# Altium PCB PCB1.PcbDoc (part 2 of 2)
Units mm, origin at the board's own origin, x right, y up, seen from the top; angles counter-clockwise.
Board outline 152.4 x 101.6 mm, 2 copper layers (Top Layer, Bottom Layer); 161 components, 26 nets, 707 pads, 0 vias.
Unrouted connection lines stored in the file: 171.
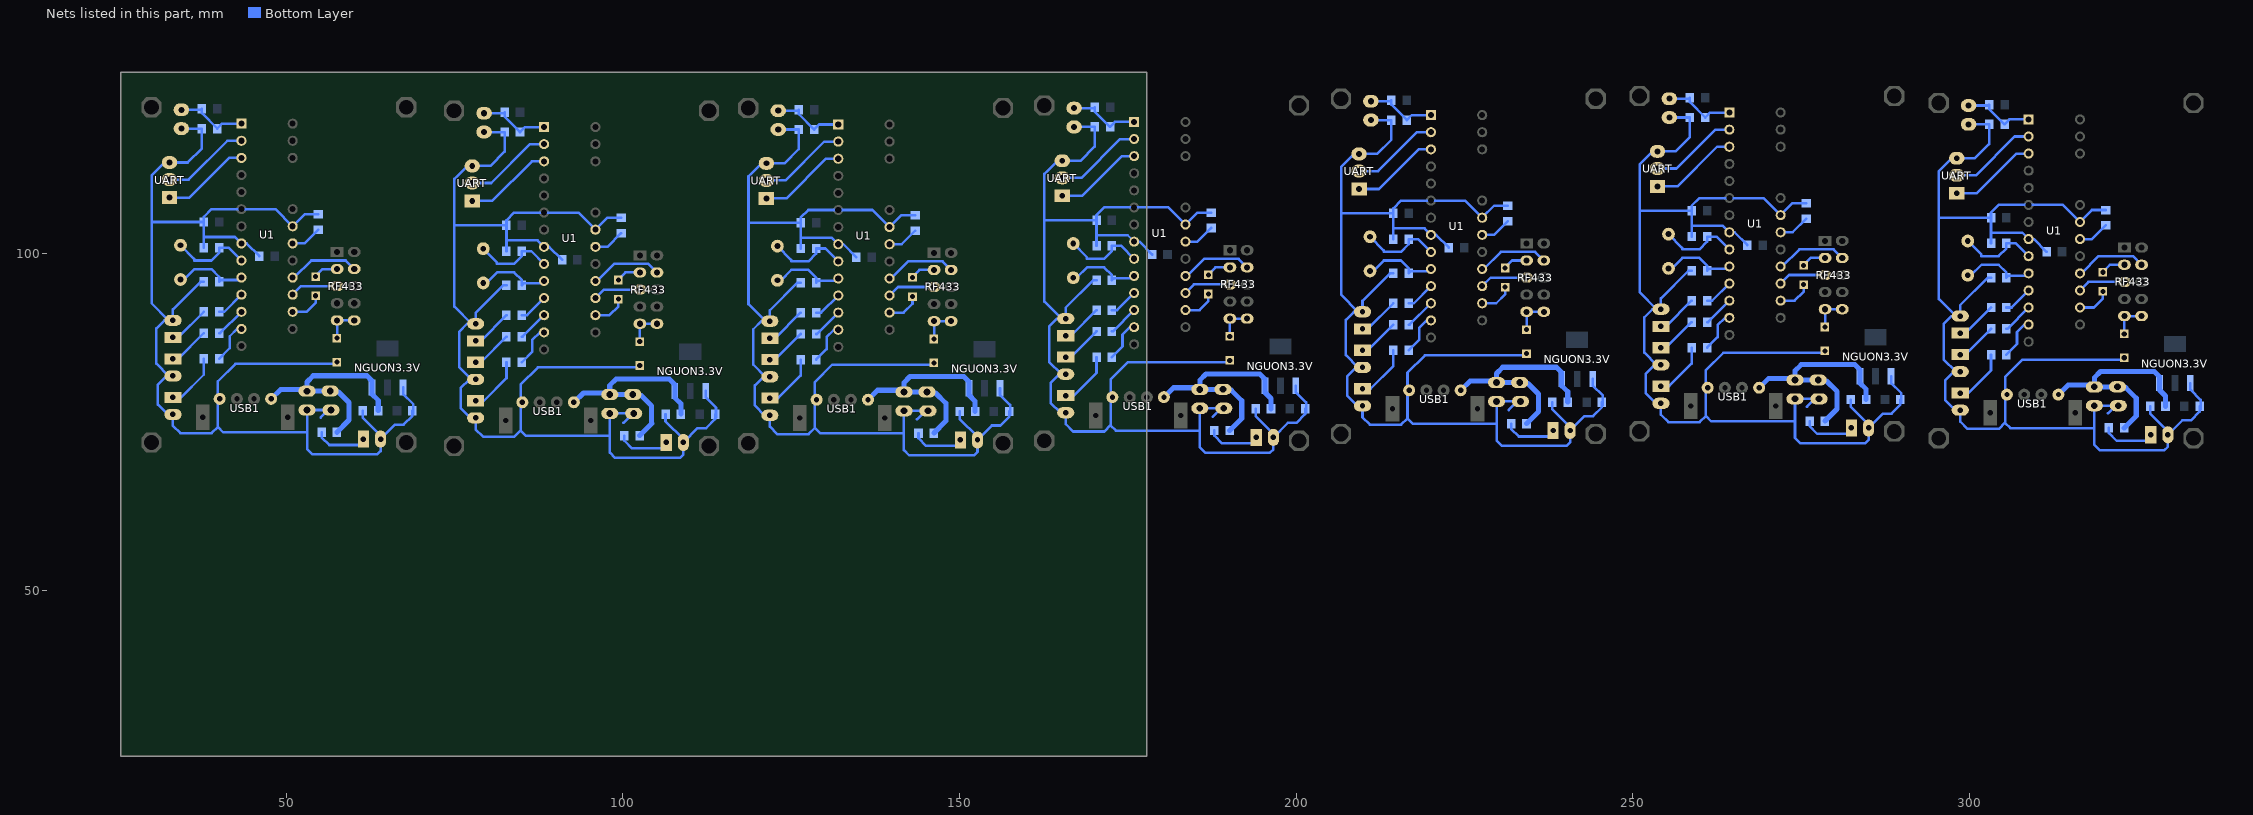
[diagram p2: the nets of this part, all layers, seen from the top]

## Nets (pads, with @x,y where several pads share a name; then routed paths per layer and width w, separated by ;. In a path a pad name is that pad's centre, name@x,y a point inside that pad or via, vN(x,y) a via of type N, cw(c..) or ccw(c..) an arc to the next point about the centre after c; other vN are vias at no path point) (continued)
GND: C1.1 C2.2 C3.1 C4.2 C5.2 C6.1 C7.1 C8.1 L1.2 L2.2 L3.2 L4.2 NGUON3.3V.1 pad.0@56.642,76.835 pad.0@57.531,83.947 pad.0@101.6,76.327 pad.0@102.489,83.439 pad.0@145.288,76.708 pad.0@146.177,83.82 pad.0@189.23,77.089 pad.0@190.119,84.201 pad.0@233.299,78.105 pad.0@234.188,85.217 pad.0@277.622,78.486 pad.0@278.511,85.598 pad.0@322.072,77.47 pad.0@322.961,84.582 pad.1@34.417,118.618 pad.1@53.086,76.835 pad.1@79.375,118.11 pad.1@98.044,76.327 pad.1@123.063,118.491 pad.1@141.732,76.708 pad.1@167.005,118.872 pad.1@185.674,77.089 pad.1@211.074,119.888 pad.1@229.743,78.105 pad.1@255.397,120.269 pad.1@274.066,78.486 pad.1@299.847,119.253 pad.1@318.516,77.47 pad.2@57.531,87.503 pad.2@102.489,86.995 pad.2@146.177,87.376 pad.2@190.119,87.757 pad.2@234.188,88.773 pad.2@278.511,89.154 pad.2@322.961,88.138 RF433.5 RF433.10 U1.8 U1.22 UART.3 USB1.4 | length 1405.1
  Bottom Layer w0.381: L3.2@33.172,81.89 L3.2@32.537,81.89 ; pad.1@34.417,118.618 C3.1@37.465,118.618 37.465,115.697 35.357,113.589 UART.3@32.664,113.589 31.928,113.589 29.997,111.658 29.997,104.623 ; C5.2@37.744,95.86 37.262,95.86 33.172,91.77 L2.2@33.172,90.145 L2.2@32.537,90.145 ; C4.2@37.744,100.94 37.744,102.527 ; C1.1@45.999,99.67 44.094,101.575 U1.8@43.332,101.575 42.38,102.527 37.744,102.527 ; 53.061,73.508 40.64,73.508 39.853,74.295 39.853,74.32 ; C8.1@54.762,105.893 52.73,105.893 U1.22@50.952,104.115 48.412,106.655 38.887,106.655 37.744,105.512 C2.2@37.744,104.75 ; 55.118,75.692 pad.0@56.261,76.835 ; pad.0@56.642,76.835 pad.0@56.261,76.835 ; pad.0@57.531,83.947 57.264,83.68 42.431,83.68 39.853,81.102 39.853,74.32 ; pad.2@57.531,87.503 57.556,87.528 RF433.5@57.556,90.145 RF433.10@60.096,90.145 ; C6.1@61.366,76.733 61.366,75.654 64.008,73.012 L4.2@64.008,72.517 ; NGUON3.3V.1@67.349,80.183 67.349,79.209 68.859,77.699 C7.1@68.859,76.276 ; C7.1@68.732,76.733 68.732,75.971 67.412,74.651 66.142,74.651 L4.2@64.008,72.517 ; L3.2@78.13,81.382 L3.2@77.495,81.382 ; pad.1@79.375,118.11 C3.1@82.423,118.11 82.423,115.189 80.315,113.081 UART.3@77.622,113.081 76.886,113.081 74.955,111.15 74.955,104.115 ; C5.2@82.702,95.352 82.22,95.352 78.13,91.262 L2.2@78.13,89.637 L2.2@77.495,89.637 ; C4.2@82.702,100.432 82.702,102.019 ; C1.1@90.957,99.162 89.052,101.067 U1.8@88.29,101.067 87.338,102.019 82.702,102.019 ; 98.019,73 85.598,73 84.811,73.787 84.811,73.812 ; C8.1@99.72,105.385 97.688,105.385 U1.22@95.91,103.607 93.37,106.147 83.845,106.147 82.702,105.004 C2.2@82.702,104.242 ; 100.076,74.93 pad.0@101.473,76.327 ; pad.0@101.6,76.327 pad.0@101.473,76.327 ; pad.0@102.489,83.439 102.222,83.172 87.389,83.172 84.811,80.594 84.811,73.812 ; pad.2@102.489,86.995 102.514,87.02 RF433.5@102.514,89.637 RF433.10@105.054,89.637 ; C6.1@106.324,76.225 106.324,75.146 108.966,72.504 L4.2@108.966,72.009 ; NGUON3.3V.1@112.307,79.675 112.307,78.701 113.817,77.191 C7.1@113.817,75.768 ; C7.1@113.69,76.225 113.69,75.463 112.37,74.143 111.1,74.143 L4.2@108.966,72.009 ; L3.2@121.818,81.763 L3.2@121.183,81.763 ; pad.1@123.063,118.491 C3.1@126.111,118.491 126.111,115.57 124.003,113.462 UART.3@121.31,113.462 120.574,113.462 118.643,111.531 118.643,104.496 ; C5.2@126.39,95.733 125.908,95.733 121.818,91.643 L2.2@121.818,90.018 L2.2@121.183,90.018 ; C4.2@126.39,100.813 126.39,102.4 ; C1.1@134.645,99.543 132.74,101.448 U1.8@131.978,101.448 131.026,102.4 126.39,102.4 ; 141.707,73.381 129.286,73.381 128.499,74.168 128.499,74.193 ; C8.1@143.408,105.766 141.376,105.766 U1.22@139.598,103.988 137.058,106.528 127.533,106.528 126.39,105.385 C2.2@126.39,104.623 ; 143.637,75.438 pad.0@144.907,76.708 ; pad.0@145.288,76.708 pad.0@144.907,76.708 ; pad.0@146.177,83.82 145.91,83.553 131.077,83.553 128.499,80.975 128.499,74.193 ; pad.2@146.177,87.376 146.202,87.401 RF433.5@146.202,90.018 RF433.10@148.742,90.018 ; C6.1@150.012,76.606 150.012,75.527 152.654,72.885 L4.2@152.654,72.39 ; NGUON3.3V.1@155.995,80.056 155.995,79.082 157.505,77.572 C7.1@157.505,76.149 ; C7.1@157.378,76.606 157.378,75.844 156.058,74.524 154.788,74.524 L4.2@152.654,72.39 ; L3.2@165.76,82.144 L3.2@165.125,82.144 ; pad.1@167.005,118.872 C3.1@170.053,118.872 170.053,115.951 167.945,113.843 UART.3@165.252,113.843 164.516,113.843 162.585,111.912 162.585,104.877 ; C5.2@170.332,96.114 169.85,96.114 165.76,92.024 L2.2@165.76,90.399 L2.2@165.125,90.399 ; C4.2@170.332,101.194 170.332,102.781 ; C1.1@178.587,99.924 176.682,101.829 U1.8@175.92,101.829 174.968,102.781 170.332,102.781 ; 185.649,73.762 173.228,73.762 172.441,74.549 172.441,74.574 ; C8.1@187.35,106.147 185.318,106.147 U1.22@183.54,104.369 181,106.909 171.475,106.909 170.332,105.766 C2.2@170.332,105.004 ; 187.579,75.819 pad.0@188.849,77.089 ; pad.0@189.23,77.089 pad.0@188.849,77.089 ; pad.0@190.119,84.201 189.852,83.934 175.019,83.934 172.441,81.356 172.441,74.574 ; pad.2@190.119,87.757 190.144,87.782 RF433.5@190.144,90.399 RF433.10@192.684,90.399 ; C6.1@193.954,76.987 193.954,75.908 196.596,73.266 L4.2@196.596,72.771 ; NGUON3.3V.1@199.937,80.437 199.937,79.463 201.447,77.953 C7.1@201.447,76.53 ; C7.1@201.32,76.987 201.32,76.225 200,74.905 198.73,74.905 L4.2@196.596,72.771 ; L3.2@209.829,83.16 L3.2@209.194,83.16 ; pad.1@211.074,119.888 C3.1@214.122,119.888 214.122,116.967 212.014,114.859 UART.3@209.321,114.859 208.585,114.859 206.654,112.928 206.654,105.893 ; C5.2@214.401,97.13 213.919,97.13 209.829,93.04 L2.2@209.829,91.415 L2.2@209.194,91.415 ; C4.2@214.401,102.21 214.401,103.797 ; C1.1@222.656,100.94 220.751,102.845 U1.8@219.989,102.845 219.037,103.797 214.401,103.797 ; 229.718,74.778 217.297,74.778 216.51,75.565 216.51,75.59 ; C8.1@231.419,107.163 229.387,107.163 U1.22@227.609,105.385 225.069,107.925 215.544,107.925 214.401,106.782 C2.2@214.401,106.02 ; 231.521,76.835 pad.0@232.791,78.105 ; pad.0@233.299,78.105 pad.0@232.791,78.105 ; pad.0@234.188,85.217 233.921,84.95 219.088,84.95 216.51,82.372 216.51,75.59 ; pad.2@234.188,88.773 234.213,88.798 RF433.5@234.213,91.415 RF433.10@236.753,91.415 ; C6.1@238.023,78.003 238.023,76.924 240.665,74.282 L4.2@240.665,73.787 ; NGUON3.3V.1@244.006,81.453 244.006,80.479 245.516,78.969 C7.1@245.516,77.546 ; C7.1@245.389,78.003 245.389,77.241 244.069,75.921 242.799,75.921 L4.2@240.665,73.787 ; L3.2@254.152,83.541 L3.2@253.517,83.541 ; pad.1@255.397,120.269 C3.1@258.445,120.269 258.445,117.348 256.337,115.24 UART.3@253.644,115.24 252.908,115.24 250.977,113.309 250.977,106.274 ; C5.2@258.724,97.511 258.242,97.511 254.152,93.421 L2.2@254.152,91.796 L2.2@253.517,91.796 ; C4.2@258.724,102.591 258.724,104.178 ; C1.1@266.979,101.321 265.074,103.226 U1.8@264.312,103.226 263.36,104.178 258.724,104.178 ; 274.041,75.159 261.62,75.159 260.833,75.946 260.833,75.971 ; C8.1@275.742,107.544 273.71,107.544 U1.22@271.932,105.766 269.392,108.306 259.867,108.306 258.724,107.163 C2.2@258.724,106.401 ; 275.844,77.343 pad.0@276.987,78.486 ; pad.0@277.622,78.486 pad.0@276.987,78.486 ; pad.0@278.511,85.598 278.244,85.331 263.411,85.331 260.833,82.753 260.833,75.971 ; pad.2@278.511,89.154 278.536,89.179 RF433.5@278.536,91.796 RF433.10@281.076,91.796 ; C6.1@282.346,78.384 282.346,77.305 284.988,74.663 L4.2@284.988,74.168 ; NGUON3.3V.1@288.329,81.834 288.329,80.86 289.839,79.35 C7.1@289.839,77.927 ; C7.1@289.712,78.384 289.712,77.622 288.392,76.302 287.122,76.302 L4.2@284.988,74.168 ; L3.2@298.602,82.525 L3.2@297.967,82.525 ; pad.1@299.847,119.253 C3.1@302.895,119.253 302.895,116.332 300.787,114.224 UART.3@298.094,114.224 297.358,114.224 295.427,112.293 295.427,105.258 ; C5.2@303.174,96.495 302.692,96.495 298.602,92.405 L2.2@298.602,90.78 L2.2@297.967,90.78 ; C4.2@303.174,101.575 303.174,103.162 ; C1.1@311.429,100.305 309.524,102.21 U1.8@308.762,102.21 307.81,103.162 303.174,103.162 ; 318.491,74.143 306.07,74.143 305.283,74.93 305.283,74.955 ; C8.1@320.192,106.528 318.16,106.528 U1.22@316.382,104.75 313.842,107.29 304.317,107.29 303.174,106.147 C2.2@303.174,105.385 ; 320.548,76.327 pad.0@321.691,77.47 ; pad.0@322.072,77.47 pad.0@321.691,77.47 ; pad.0@322.961,84.582 322.694,84.315 307.861,84.315 305.283,81.737 305.283,74.955 ; pad.2@322.961,88.138 322.986,88.163 RF433.5@322.986,90.78 RF433.10@325.526,90.78 ; C6.1@326.796,77.368 326.796,76.289 329.438,73.647 L4.2@329.438,73.152 ; NGUON3.3V.1@332.779,80.818 332.779,79.844 334.289,78.334 C7.1@334.289,76.911 ; C7.1@334.162,77.368 334.162,76.606 332.842,75.286 331.572,75.286 L4.2@329.438,73.152 ; 29.997,104.623 29.997,92.685 L2.2@32.537,90.145 ; 29.997,104.623 30.124,104.75 C2.2@37.744,104.75 ; L3.2@32.537,81.89 30.709,83.718 30.709,88.951 31.902,90.145 L2.2@32.537,90.145 ; L3.2@32.537,81.89 32.233,81.89 30.937,80.594 30.937,77.648 32.41,76.175 L1.2@33.172,76.175 33.172,74.473 34.265,73.381 38.913,73.381 39.853,74.32 ; 37.744,102.527 C2.2@37.744,104.75 ; pad.0@56.261,76.835 pad.1@53.086,76.835 53.086,71.018 53.873,70.231 63.5,70.231 64.008,70.739 L4.2@64.008,72.517 ; 74.955,104.115 75.082,104.242 C2.2@82.702,104.242 ; 74.955,104.115 74.955,92.177 L2.2@77.495,89.637 ; L3.2@77.495,81.382 77.191,81.382 75.895,80.086 75.895,77.14 77.368,75.667 L1.2@78.13,75.667 78.13,73.965 79.223,72.873 83.871,72.873 84.811,73.812 ; L3.2@77.495,81.382 75.667,83.21 75.667,88.443 76.86,89.637 L2.2@77.495,89.637 ; 82.702,102.019 C2.2@82.702,104.242 ; pad.0@101.473,76.327 pad.1@98.044,76.327 98.044,70.51 98.831,69.723 108.458,69.723 108.966,70.231 L4.2@108.966,72.009 ; 118.643,104.496 118.77,104.623 C2.2@126.39,104.623 ; 118.643,104.496 118.643,92.558 L2.2@121.183,90.018 ; L3.2@121.183,81.763 120.879,81.763 119.583,80.467 119.583,77.521 121.056,76.048 L1.2@121.818,76.048 121.818,74.346 122.911,73.254 127.559,73.254 128.499,74.193 ; L3.2@121.183,81.763 119.355,83.591 119.355,88.824 120.548,90.018 L2.2@121.183,90.018 ; 126.39,102.4 C2.2@126.39,104.623 ; pad.0@144.907,76.708 pad.1@141.732,76.708 141.732,70.891 142.519,70.104 152.146,70.104 152.654,70.612 L4.2@152.654,72.39 ; 162.585,104.877 162.712,105.004 C2.2@170.332,105.004 ; 162.585,104.877 162.585,92.939 L2.2@165.125,90.399 ; L3.2@165.125,82.144 164.821,82.144 163.525,80.848 163.525,77.902 164.998,76.429 L1.2@165.76,76.429 165.76,74.727 166.853,73.635 171.501,73.635 172.441,74.574 ; L3.2@165.125,82.144 163.297,83.972 163.297,89.205 164.49,90.399 L2.2@165.125,90.399 ; 170.332,102.781 C2.2@170.332,105.004 ; pad.0@188.849,77.089 pad.1@185.674,77.089 185.674,71.272 186.461,70.485 196.088,70.485 196.596,70.993 L4.2@196.596,72.771 ; 206.654,105.893 206.781,106.02 C2.2@214.401,106.02 ; 206.654,105.893 206.654,93.955 L2.2@209.194,91.415 ; L3.2@209.194,83.16 208.89,83.16 207.594,81.864 207.594,78.918 209.067,77.445 L1.2@209.829,77.445 209.829,75.743 210.922,74.651 215.57,74.651 216.51,75.59 ; L3.2@209.194,83.16 207.366,84.988 207.366,90.221 208.559,91.415 L2.2@209.194,91.415 ; 214.401,103.797 C2.2@214.401,106.02 ; pad.0@232.791,78.105 pad.1@229.743,78.105 229.743,72.288 230.53,71.501 240.157,71.501 240.665,72.009 L4.2@240.665,73.787 ; 250.977,106.274 251.104,106.401 C2.2@258.724,106.401 ; 250.977,106.274 250.977,94.336 L2.2@253.517,91.796 ; L3.2@253.517,83.541 253.213,83.541 251.917,82.245 251.917,79.299 253.39,77.826 L1.2@254.152,77.826 254.152,76.124 255.245,75.032 259.893,75.032 260.833,75.971 ; L3.2@253.517,83.541 251.689,85.369 251.689,90.602 252.882,91.796 L2.2@253.517,91.796 ; 258.724,104.178 C2.2@258.724,106.401 ; pad.0@276.987,78.486 pad.1@274.066,78.486 274.066,72.669 274.853,71.882 284.48,71.882 284.988,72.39 L4.2@284.988,74.168 ; 295.427,105.258 295.554,105.385 C2.2@303.174,105.385 ; 295.427,105.258 295.427,93.32 L2.2@297.967,90.78 ; L3.2@297.967,82.525 297.663,82.525 296.367,81.229 296.367,78.283 297.84,76.81 L1.2@298.602,76.81 298.602,75.108 299.695,74.016 304.343,74.016 305.283,74.955 ; L3.2@297.967,82.525 296.139,84.353 296.139,89.586 297.332,90.78 L2.2@297.967,90.78 ; 303.174,103.162 C2.2@303.174,105.385 ; pad.0@321.691,77.47 pad.1@318.516,77.47 318.516,71.653 319.303,70.866 328.93,70.866 329.438,71.374 L4.2@329.438,73.152
LED1: R4.1 U1.13 | length 43.3
  Bottom Layer w0.381: R4.1@40.03,84.43 41.605,86.004 41.605,87.782 42.697,88.875 U1.13@43.332,88.875 ; R4.1@84.988,83.922 86.563,85.496 86.563,87.274 87.655,88.367 U1.13@88.29,88.367 ; R4.1@128.676,84.303 130.251,85.877 130.251,87.655 131.343,88.748 U1.13@131.978,88.748 ; R4.1@172.618,84.684 174.193,86.258 174.193,88.036 175.285,89.129 U1.13@175.92,89.129 ; R4.1@216.687,85.7 218.262,87.274 218.262,89.052 219.354,90.145 U1.13@219.989,90.145 ; R4.1@261.01,86.081 262.585,87.655 262.585,89.433 263.677,90.526 U1.13@264.312,90.526 ; R4.1@305.46,85.065 307.035,86.639 307.035,88.417 308.127,89.51 U1.13@308.762,89.51
LED2: R5.1 U1.11 | length 30.5
  Bottom Layer w0.381: R5.1@40.03,91.415 40.792,91.415 U1.11@43.332,93.955 ; R5.1@84.988,90.907 85.75,90.907 U1.11@88.29,93.447 ; R5.1@128.676,91.288 129.438,91.288 U1.11@131.978,93.828 ; R5.1@172.618,91.669 173.38,91.669 U1.11@175.92,94.209 ; R5.1@216.687,92.685 217.449,92.685 U1.11@219.989,95.225 ; R5.1@261.01,93.066 261.772,93.066 U1.11@264.312,95.606 ; R5.1@305.46,92.05 306.222,92.05 U1.11@308.762,94.59
LED3: R6.1 U1.12 | length 32.3
  Bottom Layer w0.381: R6.1@40.03,88.24 40.157,88.24 U1.12@43.332,91.415 ; R6.1@84.988,87.732 85.115,87.732 U1.12@88.29,90.907 ; R6.1@128.676,88.113 128.803,88.113 U1.12@131.978,91.288 ; R6.1@172.618,88.494 172.745,88.494 U1.12@175.92,91.669 ; R6.1@216.687,89.51 216.814,89.51 U1.12@219.989,92.685 ; R6.1@261.01,89.891 261.137,89.891 U1.12@264.312,93.066 ; R6.1@305.46,88.875 305.587,88.875 U1.12@308.762,92.05
MISO: RF433.3 U1.18 | length 49.9
  Bottom Layer w0.381: U1.18@50.952,93.955 52.222,95.225 RF433.3@57.556,95.225 ; U1.18@95.91,93.447 97.18,94.717 RF433.3@102.514,94.717 ; U1.18@139.598,93.828 140.868,95.098 RF433.3@146.202,95.098 ; U1.18@183.54,94.209 184.81,95.479 RF433.3@190.144,95.479 ; U1.18@227.609,95.225 228.879,96.495 RF433.3@234.213,96.495 ; U1.18@271.932,95.606 273.202,96.876 RF433.3@278.536,96.876 ; U1.18@316.382,94.59 317.652,95.86 RF433.3@322.986,95.86
MOSI: pad.3@54.356,96.647 pad.3@99.314,96.139 pad.3@143.002,96.52 pad.3@186.944,96.901 pad.3@231.013,97.917 pad.3@275.336,98.298 pad.3@319.786,97.282 pad.4 RF433.2 U1.17 | length 61.1
  Bottom Layer w0.381: U1.17@50.952,91.415 53.035,91.415 54.356,92.735 pad.4@54.356,93.802 ; pad.3@54.356,96.647 54.356,96.723 55.397,97.765 RF433.2@57.556,97.765 ; U1.17@95.91,90.907 97.993,90.907 99.314,92.227 pad.4@99.314,93.294 ; pad.3@99.314,96.139 99.314,96.215 100.355,97.257 RF433.2@102.514,97.257 ; U1.17@139.598,91.288 141.681,91.288 143.002,92.608 pad.4@143.002,93.675 ; pad.3@143.002,96.52 143.002,96.596 144.043,97.638 RF433.2@146.202,97.638 ; U1.17@183.54,91.669 185.623,91.669 186.944,92.989 pad.4@186.944,94.056 ; pad.3@186.944,96.901 186.944,96.977 187.985,98.019 RF433.2@190.144,98.019 ; U1.17@227.609,92.685 229.692,92.685 231.013,94.005 pad.4@231.013,95.072 ; pad.3@231.013,97.917 231.013,97.993 232.054,99.035 RF433.2@234.213,99.035 ; U1.17@271.932,93.066 274.015,93.066 275.336,94.386 pad.4@275.336,95.453 ; pad.3@275.336,98.298 275.336,98.374 276.377,99.416 RF433.2@278.536,99.416 ; U1.17@316.382,92.05 318.465,92.05 319.786,93.37 pad.4@319.786,94.437 ; pad.3@319.786,97.282 319.786,97.358 320.827,98.4 RF433.2@322.986,98.4
NC: 
NetC8_2: C8.2 U1.21 | length 32.6
  Bottom Layer w0.381: U1.21@50.952,101.575 52.73,101.575 C8.2@54.762,103.607 ; U1.21@95.91,101.067 97.688,101.067 C8.2@99.72,103.099 ; U1.21@139.598,101.448 141.376,101.448 C8.2@143.408,103.48 ; U1.21@183.54,101.829 185.318,101.829 C8.2@187.35,103.861 ; U1.21@227.609,102.845 229.387,102.845 C8.2@231.419,104.877 ; U1.21@271.932,103.226 273.71,103.226 C8.2@275.742,105.258 ; U1.21@316.382,102.21 318.16,102.21 C8.2@320.192,104.242
NetL1_1: L1.1 R4.2 | length 58.3
  Bottom Layer w0.381: L1.1@33.172,78.715 34.392,78.715 37.744,82.067 R4.2@37.744,84.43 ; L1.1@78.13,78.207 79.35,78.207 82.702,81.559 R4.2@82.702,83.922 ; L1.1@121.818,78.588 123.038,78.588 126.39,81.94 R4.2@126.39,84.303 ; L1.1@165.76,78.969 166.98,78.969 170.332,82.321 R4.2@170.332,84.684 ; L1.1@209.829,79.985 211.049,79.985 214.401,83.337 R4.2@214.401,85.7 ; L1.1@254.152,80.366 255.372,80.366 258.724,83.718 R4.2@258.724,86.081 ; L1.1@298.602,79.35 299.822,79.35 303.174,82.702 R4.2@303.174,85.065
NetL2_1: L2.1 R5.2 | length 43.1
  Bottom Layer w0.381: L2.1@33.172,87.605 33.934,87.605 R5.2@37.744,91.415 ; L2.1@78.13,87.097 78.892,87.097 R5.2@82.702,90.907 ; L2.1@121.818,87.478 122.58,87.478 R5.2@126.39,91.288 ; L2.1@165.76,87.859 166.522,87.859 R5.2@170.332,91.669 ; L2.1@209.829,88.875 210.591,88.875 R5.2@214.401,92.685 ; L2.1@254.152,89.256 254.914,89.256 R5.2@258.724,93.066 ; L2.1@298.602,88.24 299.364,88.24 R5.2@303.174,92.05
NetL3_1: L3.1 R6.2 | length 43.1
  Bottom Layer w0.381: L3.1@33.172,84.43 33.934,84.43 R6.2@37.744,88.24 ; L3.1@78.13,83.922 78.892,83.922 R6.2@82.702,87.732 ; L3.1@121.818,84.303 122.58,84.303 R6.2@126.39,88.113 ; L3.1@165.76,84.684 166.522,84.684 R6.2@170.332,88.494 ; L3.1@209.829,85.7 210.591,85.7 R6.2@214.401,89.51 ; L3.1@254.152,86.081 254.914,86.081 R6.2@258.724,89.891 ; L3.1@298.602,85.065 299.364,85.065 R6.2@303.174,88.875
NetL4_1: L4.1 R7.2 | length 56.9
  Bottom Layer w0.381: R7.2@55.245,73.533 55.245,72.771 56.388,71.628 61.087,71.628 61.468,72.009 L4.1@61.468,72.517 ; R7.2@100.203,73.025 100.203,72.263 101.346,71.12 106.045,71.12 106.426,71.501 L4.1@106.426,72.009 ; R7.2@143.891,73.406 143.891,72.644 145.034,71.501 149.733,71.501 150.114,71.882 L4.1@150.114,72.39 ; R7.2@187.833,73.787 187.833,73.025 188.976,71.882 193.675,71.882 194.056,72.263 L4.1@194.056,72.771 ; R7.2@231.902,74.803 231.902,74.041 233.045,72.898 237.744,72.898 238.125,73.279 L4.1@238.125,73.787 ; R7.2@276.225,75.184 276.225,74.422 277.368,73.279 282.067,73.279 282.448,73.66 L4.1@282.448,74.168 ; R7.2@320.675,74.168 320.675,73.406 321.818,72.263 326.517,72.263 326.898,72.644 L4.1@326.898,73.152
OSC1: C4.1 U1.9 X1.2 | length 85
  Bottom Layer w0.381: X1.2@34.29,101.295 36.322,99.263 36.322,99.035 38.887,99.035 40.03,100.178 C4.1@40.03,100.94 41.427,100.94 U1.9@43.332,99.035 ; X1.2@79.248,100.787 81.28,98.755 81.28,98.527 83.845,98.527 84.988,99.67 C4.1@84.988,100.432 86.385,100.432 U1.9@88.29,98.527 ; X1.2@122.936,101.168 124.968,99.136 124.968,98.908 127.533,98.908 128.676,100.051 C4.1@128.676,100.813 130.073,100.813 U1.9@131.978,98.908 ; X1.2@166.878,101.549 168.91,99.517 168.91,99.289 171.475,99.289 172.618,100.432 C4.1@172.618,101.194 174.015,101.194 U1.9@175.92,99.289 ; X1.2@210.947,102.565 212.979,100.533 212.979,100.305 215.544,100.305 216.687,101.448 C4.1@216.687,102.21 218.084,102.21 U1.9@219.989,100.305 ; X1.2@255.27,102.946 257.302,100.914 257.302,100.686 259.867,100.686 261.01,101.829 C4.1@261.01,102.591 262.407,102.591 U1.9@264.312,100.686 ; X1.2@299.72,101.93 301.752,99.898 301.752,99.67 304.317,99.67 305.46,100.813 C4.1@305.46,101.575 306.857,101.575 U1.9@308.762,99.67
OSC2: C5.1 U1.10 X1.1 | length 78.3
  Bottom Layer w0.381: X1.1@34.29,96.215 34.798,96.215 36.347,97.765 38.887,97.765 40.03,96.622 C5.1@40.03,95.86 40.31,96.139 42.977,96.139 U1.10@43.332,96.495 ; X1.1@79.248,95.707 79.756,95.707 81.305,97.257 83.845,97.257 84.988,96.114 C5.1@84.988,95.352 85.268,95.631 87.935,95.631 U1.10@88.29,95.987 ; X1.1@122.936,96.088 123.444,96.088 124.993,97.638 127.533,97.638 128.676,96.495 C5.1@128.676,95.733 128.956,96.012 131.623,96.012 U1.10@131.978,96.368 ; X1.1@166.878,96.469 167.386,96.469 168.935,98.019 171.475,98.019 172.618,96.876 C5.1@172.618,96.114 172.898,96.393 175.565,96.393 U1.10@175.92,96.749 ; X1.1@210.947,97.485 211.455,97.485 213.004,99.035 215.544,99.035 216.687,97.892 C5.1@216.687,97.13 216.967,97.409 219.634,97.409 U1.10@219.989,97.765 ; X1.1@255.27,97.866 255.778,97.866 257.327,99.416 259.867,99.416 261.01,98.273 C5.1@261.01,97.511 261.29,97.79 263.957,97.79 U1.10@264.312,98.146 ; X1.1@299.72,96.85 300.228,96.85 301.777,98.4 304.317,98.4 305.46,97.257 C5.1@305.46,96.495 305.74,96.774 308.407,96.774 U1.10@308.762,97.13
RESET: C3.2 pad.0@34.417,121.412 pad.0@79.375,120.904 pad.0@123.063,121.285 pad.0@167.005,121.666 pad.0@211.074,122.682 pad.0@255.397,123.063 pad.0@299.847,122.047 R1.1 U1.1 | length 79.5
  Bottom Layer w0.381: pad.0@34.417,121.412 37.338,121.412 R1.1@37.465,121.539 37.465,120.904 C3.2@39.751,118.618 40.488,119.355 U1.1@43.332,119.355 U1.1@42.977,118.999 ; pad.0@79.375,120.904 82.296,120.904 R1.1@82.423,121.031 82.423,120.396 C3.2@84.709,118.11 85.446,118.847 U1.1@88.29,118.847 U1.1@87.935,118.491 ; pad.0@123.063,121.285 125.984,121.285 R1.1@126.111,121.412 126.111,120.777 C3.2@128.397,118.491 129.134,119.228 U1.1@131.978,119.228 U1.1@131.623,118.872 ; pad.0@167.005,121.666 169.926,121.666 R1.1@170.053,121.793 170.053,121.158 C3.2@172.339,118.872 173.076,119.609 U1.1@175.92,119.609 U1.1@175.565,119.253 ; pad.0@211.074,122.682 213.995,122.682 R1.1@214.122,122.809 214.122,122.174 C3.2@216.408,119.888 217.145,120.625 U1.1@219.989,120.625 U1.1@219.634,120.269 ; pad.0@255.397,123.063 258.318,123.063 R1.1@258.445,123.19 258.445,122.555 C3.2@260.731,120.269 261.468,121.006 U1.1@264.312,121.006 U1.1@263.957,120.65 ; pad.0@299.847,122.047 302.768,122.047 R1.1@302.895,122.174 302.895,121.539 C3.2@305.181,119.253 305.918,119.99 U1.1@308.762,119.99 U1.1@308.407,119.634
RX: U1.2 UART.2 | length 91.4
  Bottom Layer w0.381: UART.2@32.664,111.049 35.484,111.049 41.25,116.815 U1.2@43.332,116.815 ; UART.2@77.622,110.541 80.442,110.541 86.208,116.307 U1.2@88.29,116.307 ; UART.2@121.31,110.922 124.13,110.922 129.896,116.688 U1.2@131.978,116.688 ; UART.2@165.252,111.303 168.072,111.303 173.838,117.069 U1.2@175.92,117.069 ; UART.2@209.321,112.319 212.141,112.319 217.907,118.085 U1.2@219.989,118.085 ; UART.2@253.644,112.7 256.464,112.7 262.23,118.466 U1.2@264.312,118.466 ; UART.2@298.094,111.684 300.914,111.684 306.68,117.45 U1.2@308.762,117.45
SCK: RF433.7 U1.19 | length 75.1
  Bottom Layer w0.381: U1.19@50.952,96.495 51.179,96.495 53.719,99.035 58.826,99.035 RF433.7@60.096,97.765 ; U1.19@95.91,95.987 96.137,95.987 98.677,98.527 103.784,98.527 RF433.7@105.054,97.257 ; U1.19@139.598,96.368 139.825,96.368 142.365,98.908 147.472,98.908 RF433.7@148.742,97.638 ; U1.19@183.54,96.749 183.767,96.749 186.307,99.289 191.414,99.289 RF433.7@192.684,98.019 ; U1.19@227.609,97.765 227.836,97.765 230.376,100.305 235.483,100.305 RF433.7@236.753,99.035 ; U1.19@271.932,98.146 272.159,98.146 274.699,100.686 279.806,100.686 RF433.7@281.076,99.416 ; U1.19@316.382,97.13 316.609,97.13 319.149,99.67 324.256,99.67 RF433.7@325.526,98.4
TX: U1.3 UART.1 | length 91.8
  Bottom Layer w0.381: UART.1@32.664,108.382 35.611,108.382 41.504,114.275 U1.3@43.332,114.275 ; UART.1@77.622,107.874 80.569,107.874 86.462,113.767 U1.3@88.29,113.767 ; UART.1@121.31,108.255 124.257,108.255 130.15,114.148 U1.3@131.978,114.148 ; UART.1@165.252,108.636 168.199,108.636 174.092,114.529 U1.3@175.92,114.529 ; UART.1@209.321,109.652 212.268,109.652 218.161,115.545 U1.3@219.989,115.545 ; UART.1@253.644,110.033 256.591,110.033 262.484,115.926 U1.3@264.312,115.926 ; UART.1@298.094,109.017 301.041,109.017 306.934,114.91 U1.3@308.762,114.91
VCC: C6.2 NGUON3.3V.3 pad.0@53.086,79.629 pad.0@56.515,79.645 pad.0@98.044,79.121 pad.0@101.473,79.137 pad.0@141.732,79.502 pad.0@145.161,79.518 pad.0@185.674,79.883 pad.0@189.103,79.899 pad.0@229.743,80.899 pad.0@233.172,80.915 pad.0@274.066,81.28 pad.0@277.495,81.296 pad.0@318.516,80.264 pad.0@321.945,80.28 R7.1 USB1.1 | length 242.5
  Bottom Layer w0.762: USB1.1@47.752,78.486 47.777,78.486 49.174,79.883 52.832,79.883 pad.0@53.086,79.629 ; R7.1@57.531,73.533 59.334,75.336 59.309,75.362 59.309,77.953 57.76,79.502 56.658,79.502 pad.0@56.515,79.645 56.499,79.629 pad.0@53.086,79.629 ; C6.2@63.652,76.733 63.652,78.264 62.749,79.167 NGUON3.3V.3@62.749,80.183 62.749,81.142 61.976,81.915 54,81.915 53.086,81.001 pad.0@53.086,79.629 ; USB1.1@92.71,77.978 92.735,77.978 94.132,79.375 97.79,79.375 pad.0@98.044,79.121 ; R7.1@102.489,73.025 104.292,74.828 104.267,74.854 104.267,77.445 102.718,78.994 101.616,78.994 pad.0@101.473,79.137 101.457,79.121 pad.0@98.044,79.121 ; C6.2@108.61,76.225 108.61,77.756 107.707,78.659 NGUON3.3V.3@107.707,79.675 107.707,80.634 106.934,81.407 98.958,81.407 98.044,80.493 pad.0@98.044,79.121 ; USB1.1@136.398,78.359 136.423,78.359 137.82,79.756 141.478,79.756 pad.0@141.732,79.502 ; R7.1@146.177,73.406 147.955,75.184 147.955,77.826 146.406,79.375 145.304,79.375 pad.0@145.161,79.518 145.145,79.502 pad.0@141.732,79.502 ; C6.2@152.298,76.606 152.298,78.137 151.395,79.04 NGUON3.3V.3@151.395,80.056 151.395,81.015 150.622,81.788 142.646,81.788 141.732,80.874 pad.0@141.732,79.502 ; USB1.1@180.34,78.74 180.365,78.74 181.762,80.137 185.42,80.137 pad.0@185.674,79.883 ; R7.1@190.119,73.787 191.922,75.59 191.897,75.616 191.897,78.207 190.348,79.756 189.246,79.756 pad.0@189.103,79.899 189.087,79.883 pad.0@185.674,79.883 ; C6.2@196.24,76.987 196.24,78.518 195.337,79.421 NGUON3.3V.3@195.337,80.437 195.337,81.396 194.564,82.169 186.588,82.169 185.674,81.255 pad.0@185.674,79.883 ; USB1.1@224.409,79.756 224.434,79.756 225.831,81.153 229.489,81.153 pad.0@229.743,80.899 ; R7.1@234.188,74.803 235.991,76.606 235.966,76.632 235.966,79.223 234.417,80.772 233.315,80.772 pad.0@233.172,80.915 233.156,80.899 pad.0@229.743,80.899 ; C6.2@240.309,78.003 240.309,79.534 239.406,80.437 NGUON3.3V.3@239.406,81.453 239.406,82.412 238.633,83.185 230.657,83.185 229.743,82.271 pad.0@229.743,80.899 ; USB1.1@268.732,80.137 268.757,80.137 270.154,81.534 273.812,81.534 pad.0@274.066,81.28 ; R7.1@278.511,75.184 280.314,76.987 280.289,77.013 280.289,79.604 278.74,81.153 277.638,81.153 pad.0@277.495,81.296 277.479,81.28 pad.0@274.066,81.28 ; C6.2@284.632,78.384 284.632,79.915 283.729,80.818 NGUON3.3V.3@283.729,81.834 283.729,82.793 282.956,83.566 274.98,83.566 274.066,82.652 pad.0@274.066,81.28 ; USB1.1@313.182,79.121 313.207,79.121 314.604,80.518 318.262,80.518 pad.0@318.516,80.264 ; R7.1@322.961,74.168 324.764,75.971 324.739,75.997 324.739,78.588 323.19,80.137 322.088,80.137 pad.0@321.945,80.28 321.929,80.264 pad.0@318.516,80.264 ; C6.2@329.082,77.368 329.082,78.899 328.179,79.802 NGUON3.3V.3@328.179,80.818 328.179,81.777 327.406,82.55 319.43,82.55 318.516,81.636 pad.0@318.516,80.264
pads on no net: U1.6 U1.15 U1.24 U1.26 U1.27 U1.28 USB1.2 USB1.3 USB1.5 USB1.6
copper on no net: | length 435
  Bottom Layer w0.254: 19.57,121.687 20.066,123.215 ; 19.812,123.213 20.32,123.217 ; 20.308,26.768 20.828,25.248 ; 20.386,82.128 20.066,123.215 ; 20.508,66.335 20.828,25.248 ; 20.574,25.246 21.082,25.25 ; 20.586,121.695 20.066,123.215 ; 21.324,26.776 20.828,25.248 ; 21.484,122.802 21.971,124.333 ; 21.717,124.33 22.225,124.336 ; 22.204,70.478 22.733,68.961 ; 22.242,104.67 21.971,124.333 ; 22.462,88.624 22.733,68.961 ; 22.479,68.958 22.987,68.964 ; 22.5,122.816 21.971,124.333 ; 23.22,70.492 22.733,68.961 ; 27.051,127.889 27.051,128.397 ; 28.575,127.636 27.051,128.143 ; 28.575,128.652 27.051,128.143 ; 172.634,128.263 27.051,128.143 ; 190.205,128.277 335.788,128.397 ; 334.264,127.888 335.788,128.397 ; 334.264,128.904 335.788,128.397 ; 335.788,128.143 335.788,128.651

## Polygon pours and split planes (outlines as drawn)
GND on Bottom Layer "Top Layer-No Net" (solid, remove dead copper, pour order 54): 292.837,125.171 335.737,125.171 335.763,125.146 335.737,125.12 335.737,69.85 293.091,69.85 292.837,70.104 292.837,125.171
GND on Bottom Layer "Top Layer-No Net" (solid, remove dead copper, shelved, pour order 29): 335.763,124.968 335.559,125.171 292.837,125.171 292.837,69.85 292.862,69.875 335.763,69.875
GND on Bottom Layer "Top Layer-No Net" (solid, remove dead copper, shelved, pour order 42): 335.788,69.85 335.788,125.171 292.837,125.171 292.837,69.85
GND on Bottom Layer "Top Layer-No Net" (solid, remove dead copper, shelved, pour order 36): 335.763,125.146 335.763,69.875 292.964,69.875 292.837,70.002 292.837,125.171 335.737,125.171 335.763,125.146
GND on Bottom Layer "Top Layer-No Net" (solid, remove dead copper, shelved, pour order 36): 70.333,124.511 70.333,69.24 27.534,69.24 27.407,69.367 27.407,124.536 70.307,124.536 70.333,124.511
GND on Bottom Layer "Top Layer-No Net" (solid, remove dead copper, shelved, pour order 42): 70.358,69.215 70.358,124.536 27.407,124.536 27.407,69.215
GND on Bottom Layer "Top Layer-No Net" (solid, remove dead copper, pour order 29): 70.333,124.333 70.129,124.536 27.407,124.536 27.407,69.215 27.432,69.24 70.333,69.24
GND on Bottom Layer "Top Layer-No Net" (solid, remove dead copper, shelved, pour order 28): 115.291,123.825 115.087,124.028 72.365,124.028 72.365,68.707 72.39,68.732 115.291,68.732
GND on Bottom Layer "Top Layer-No Net" (solid, remove dead copper, shelved, pour order 41): 115.316,68.707 115.316,124.028 72.365,124.028 72.365,68.707
GND on Bottom Layer "Top Layer-No Net" (solid, remove dead copper, shelved, pour order 35): 115.291,124.003 115.291,68.732 72.492,68.732 72.365,68.859 72.365,124.028 115.265,124.028 115.291,124.003
GND on Bottom Layer "Top Layer-No Net" (solid, remove dead copper, pour order 30): 115.291,124.003 72.39,124.003 72.365,124.028 72.365,68.707 114.91,68.707 115.291,69.088
GND on Bottom Layer "Top Layer-No Net" (solid, remove dead copper, shelved, pour order 27): 158.979,124.206 158.775,124.409 116.053,124.409 116.053,69.088 116.078,69.113 158.979,69.113
GND on Bottom Layer "Top Layer-No Net" (solid, remove dead copper, shelved, pour order 40): 159.004,69.088 159.004,124.409 116.053,124.409 116.053,69.088
GND on Bottom Layer "Top Layer-No Net" (solid, remove dead copper, shelved, pour order 34): 158.979,124.384 158.979,69.113 116.18,69.113 116.053,69.24 116.053,124.409 158.953,124.409 158.979,124.384
GND on Bottom Layer "Top Layer-No Net" (solid, remove dead copper, pour order 43): 116.053,124.409 116.078,124.384 158.979,124.384 158.979,69.113 158.953,69.088 116.053,69.088
GND on Bottom Layer "Top Layer-No Net" (solid, remove dead copper, shelved, pour order 26): 202.921,124.587 202.717,124.79 159.995,124.79 159.995,69.469 160.02,69.494 202.921,69.494
GND on Bottom Layer "Top Layer-No Net" (solid, remove dead copper, shelved, pour order 39): 202.946,69.469 202.946,124.79 159.995,124.79 159.995,69.469
GND on Bottom Layer "Top Layer-No Net" (solid, remove dead copper, shelved, pour order 33): 202.921,124.765 202.921,69.494 160.122,69.494 159.995,69.621 159.995,124.79 202.895,124.79 202.921,124.765
GND on Bottom Layer "Top Layer-No Net" (solid, remove dead copper, pour order 44): 160.909,124.79 160.934,124.765 202.921,124.765 202.921,69.494 202.895,69.469 159.995,69.469
GND on Bottom Layer "Top Layer-No Net" (solid, remove dead copper, shelved, pour order 25): 246.99,125.603 246.786,125.806 204.064,125.806 204.064,70.485 204.089,70.51 246.99,70.51
GND on Bottom Layer "Top Layer-No Net" (solid, remove dead copper, shelved, pour order 38): 247.015,70.485 247.015,125.806 204.064,125.806 204.064,70.485
GND on Bottom Layer "Top Layer-No Net" (solid, remove dead copper, shelved, pour order 32): 246.99,125.781 246.99,70.51 204.191,70.51 204.064,70.637 204.064,125.806 246.964,125.806 246.99,125.781
GND on Bottom Layer "Top Layer-No Net" (solid, remove dead copper, shelved, pour order 24): 291.313,125.984 291.109,126.187 248.387,126.187 248.387,70.866 248.412,70.891 291.313,70.891
GND on Bottom Layer "Top Layer-No Net" (solid, remove dead copper, shelved, pour order 37): 291.338,70.866 291.338,126.187 248.387,126.187 248.387,70.866
GND on Bottom Layer "Top Layer-No Net" (solid, remove dead copper, shelved, pour order 31): 291.313,126.162 291.313,70.891 248.514,70.891 248.387,71.018 248.387,126.187 291.287,126.187 291.313,126.162
GND on Bottom Layer "Top Layer-No Net" (solid, remove dead copper, pour order 45): 204.064,125.806 247.015,125.806 246.99,125.781 246.99,70.51 203.937,70.51 203.835,70.612 203.835,70.993
GND on Bottom Layer "Top Layer-No Net" (solid, remove dead copper, pour order 46): 248.387,126.187 291.287,126.187 291.313,126.162 291.287,126.136 291.287,70.866 248.387,70.866 248.387,126.187

## Keep-outs
Keep-Out Layer:
  lines w0.254: 27.407,69.215 27.407,124.536 70.358,124.536 70.333,124.511 70.333,69.24 70.307,69.215 27.407,69.215 ; 72.365,68.707 115.265,68.707 115.291,68.732 115.291,124.003 115.316,124.028 72.365,124.028 72.365,68.707 ; 116.053,69.088 158.953,69.088 158.979,69.113 158.979,124.384 159.004,124.409 116.053,124.409 116.053,69.088 ; 159.995,69.469 202.895,69.469 202.921,69.494 202.921,124.765 202.946,124.79 159.995,124.79 159.995,69.469 ; 204.064,70.485 246.964,70.485 246.99,70.51 246.99,125.781 247.015,125.806 204.064,125.806 204.064,70.485 ; 248.387,70.866 291.287,70.866 291.313,70.891 291.313,126.162 291.338,126.187 248.387,126.187 248.387,70.866 ; 292.837,69.85 335.737,69.85 335.763,69.875 335.763,125.146 335.788,125.171 292.837,125.171 292.837,69.85

## Other copper
Bottom Layer:
  text "308.737 (mm)" at 172.889,127.349 h1.52 r0.05
  text "55.377 (mm)" at 21.331,104.404 h1.52 r270.79
  text "97.971 (mm)" at 19.473,81.867 h1.52 r270.45